# EAGLE board plantHAT (EAGLE 8.1.1)
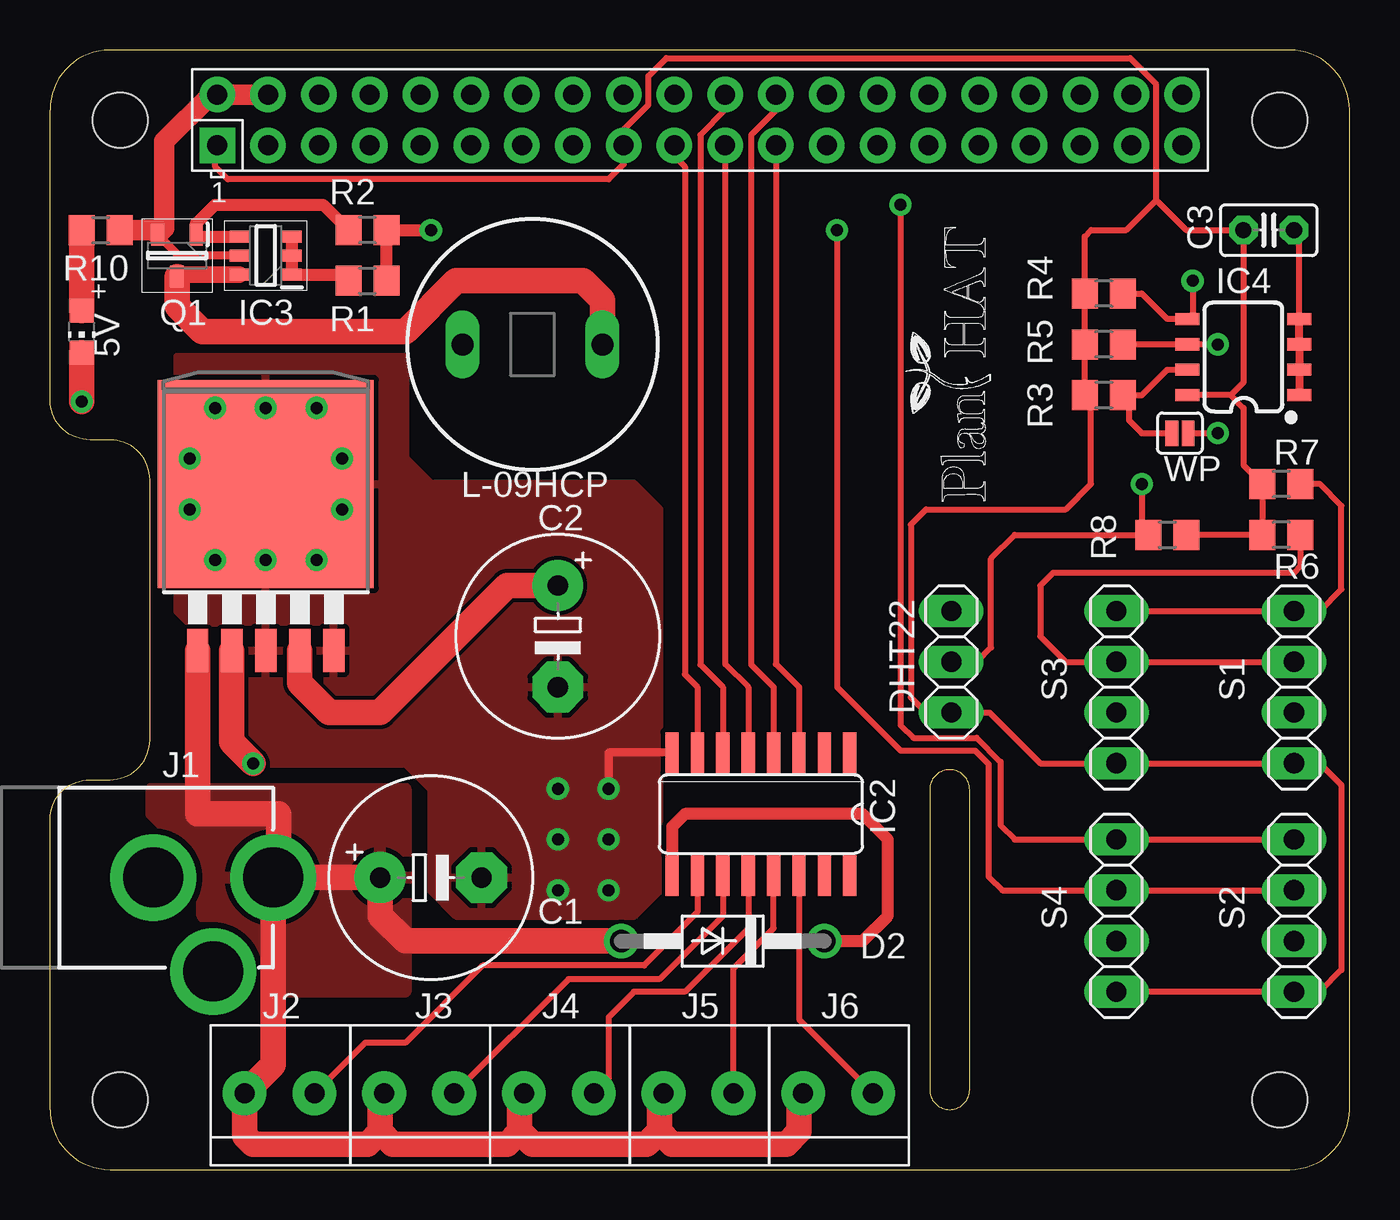
[diagram p0: board, top side]
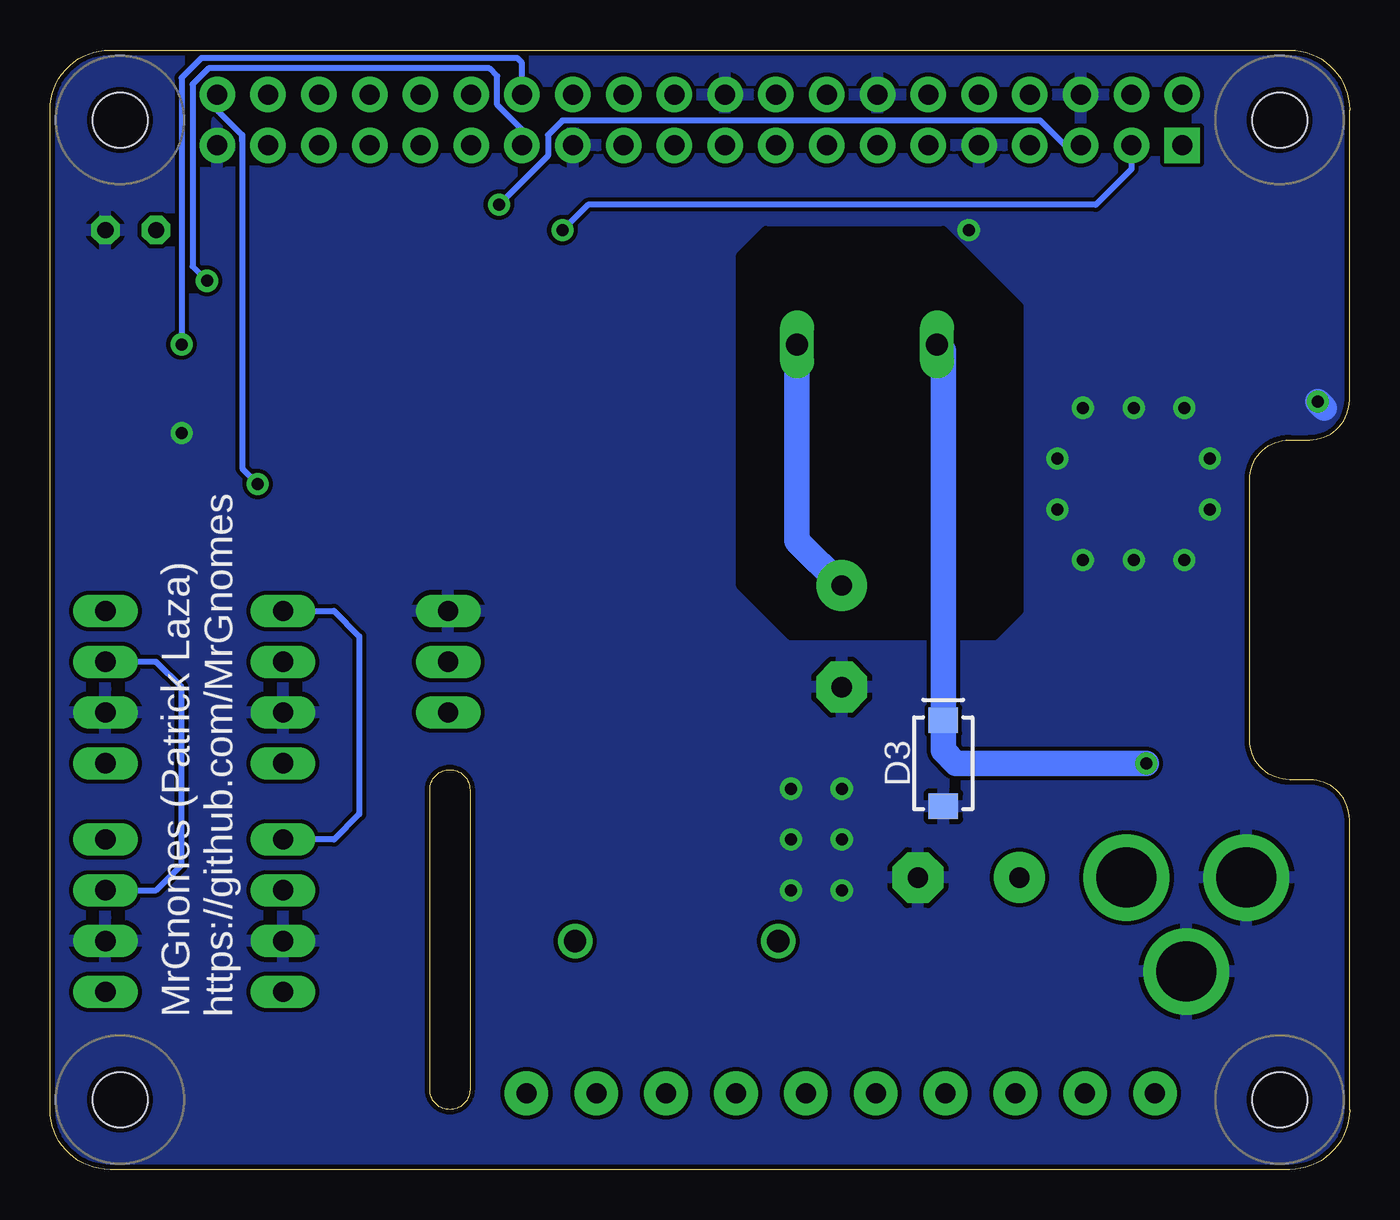
[diagram p1: board, bottom side, seen from below]

Size 65 x 56 mm. Coordinates in mm from the lower left corner, seen from the top.
Copper layers (1*16): Top 0.035mm / dielectric 1.5mm / Bottom 0.035mm
Design rules "SparkFun": minimum track width 8mil, minimum drill 20mil, track to track 8mil, track to pad 8mil, pad to pad 8mil, via to via 8mil, smd to smd 8mil, copper to edge 10mil, drill to drill 8mil, minimum pad ring 12mil, minimum via ring 10mil, stop-mask expansion 4mil, vias tented up to drill 25mil, thermal gap 10mil

## Footprints (pad centres in the part's own frame; a part is rotated, then mirrored left to right if it is on the bottom)
E5-10,5 = drill 1.016 pad 2.54: + -2.54,0 | drill 1.016 pad 2.54 octagon: - 2.54,0
C025-025X050 = drill 0.813 octagon: 1 -1.27,0; 2 1.27,0
DO41-10 = drill 1.118: A 5.08,0; C -5.08,0
SMA-DIODE = smd 1.27 x 1.47: A -2.15,0; C 2.15,0
1X03 = drill 1.016 long: 1 -2.54,0; 2 0,0; 3 2.54,0
TO263-5 = smd 1.067 x 2.159: 1 -3.404,-5.791; 2 -1.702,-5.791; 3 0,-5.791; 4 1.702,-5.791; 5 3.404,-5.791 | smd 10.8 x 10.41: 6 0,2.54
SO16 = smd 0.66 x 2.032: 1 -4.445,-3.073; 2 -3.175,-3.073; 3 -1.905,-3.073; 4 -0.635,-3.073; 5 0.635,-3.073; 6 1.905,-3.073; 7 3.175,-3.073; 8 4.445,-3.073; 9 4.445,3.073; 10 3.175,3.073; 11 1.905,3.073; 12 0.635,3.073; 13 -0.635,3.073; 14 -1.905,3.073; 15 -3.175,3.073; 16 -4.445,3.073
SOT95P275X110-6N = smd 1 x 0.6: 1 -1.3,0.95; 2 -1.3,0; 3 -1.3,-0.95; 4 1.3,-0.95; 5 1.3,0; 6 1.3,0.95
SO08 = smd 0.6 x 1.2: 1 -1.905,-2.8; 2 -0.635,-2.8; 3 0.635,-2.8; 4 1.905,-2.8; 5 1.905,2.8; 6 0.635,2.8; 7 -0.635,2.8; 8 -1.905,2.8
POWER_JACK_PTH = drill 2.997 pad 4.318: GND 0,7.7; GNDBREAK 4.7,10.7; PWR 0,13.7
1X2-3.5MM = drill 1 pad 2.184: 1 1.8,0; 2 -1.7,0
SMT-JUMPER_2_NO_SILK = smd 0.635 x 1.27: 1 -0.406,0; 2 0.406,0
CHIP-LED0805 = smd 1.2 x 1.2: A 0,-1.05; C 0,1.05
SD12-680 = drill 1.1 long: 1 -3.5,0; 2 3.5,0
SOT96P240X100-3N = smd 1.1 x 0.65: 1 -1.05,0.96; 2 -1.05,-0.96; 3 1.05,0
R0805 = smd 1.3 x 1.5: 1 -0.95,0; 2 0.95,0
1X04 = drill 1.016 long: 1 -3.81,0; 2 -1.27,0; 3 1.27,0; 4 3.81,0
RASPI_BOARD_B+HAT_DF_CF = drill 1 pad 1.778 square: 1 8.37,51.23 | drill 1 pad 1.778: 2 8.37,53.77; 3 10.91,51.23; 4 10.91,53.77; 5 13.45,51.23; 6 13.45,53.77; 7 15.99,51.23; 8 15.99,53.77; 9 18.53,51.23; 10 18.53,53.77; 11 21.07,51.23; 12 21.07,53.77; 13 23.61,51.23; 14 23.61,53.77; 15 26.15,51.23; 16 26.15,53.77; 17 28.69,51.23; 18 28.69,53.77; 19 31.23,51.23; 20 31.23,53.77; 21 33.77,51.23; 22 33.77,53.77; 23 36.31,51.23; 24 36.31,53.77; 25 38.85,51.23; 26 38.85,53.77; 27 41.39,51.23; 28 41.39,53.77; 29 43.93,51.23; 30 43.93,53.77; 31 46.47,51.23; 32 46.47,53.77; 33 49.01,51.23; 34 49.01,53.77; 35 51.55,51.23; 36 51.55,53.77; 37 54.09,51.23; 38 54.09,53.77; 39 56.63,51.23; 40 56.63,53.77 | hole 2.75: 3.5,3.5; 3.5,52.5; 61.5,3.5; 61.5,52.5

## Placement (x,y rotation side)
C1  330u/35V  [E5-10,5]  19.05,14.61 0 top
C2  180u  [E5-10,5]  25.4,26.67 270 top
C3  100n  [C025-025X050]  60.96,46.99 0 top
D2  1N4007  [DO41-10]  33.66,11.43 180 top
D3  B340A  [SMA-DIODE]  20.32,20.32 90 bottom
DHT22  [1X03]  45.09,25.4 90 top
IC1  [TO263-5]  10.79,31.75 0 top
IC2  ULN2003AD  [SO16]  35.56,17.78 180 top
IC3  DMMT5401-7-F  [SOT95P275X110-6N]  10.79,45.72 180 top
IC4  24LC256  [SO08]  59.69,40.64 90 top
J1  12V  [POWER_JACK_PTH]  -2.54,14.61 270 top
J2  1X2-3.5MM  [1X2-3.5MM]  11.43,3.81 0 top
J3  1X2-3.5MM  [1X2-3.5MM]  18.41,3.81 0 top
J4  1X2-3.5MM  [1X2-3.5MM]  25.4,3.81 0 top
J5  1X2-3.5MM  [1X2-3.5MM]  32.38,3.81 0 top
J6  1X2-3.5MM  [1X2-3.5MM]  39.37,3.81 0 top
JP1  WP  [SMT-JUMPER_2_NO_SILK]  56.52,36.83 180 top
L2  5V  [CHIP-LED0805]  1.59,41.91 180 top
L-09HCP  68u  [SD12-680]  24.13,41.27 0 top
Q1  DMG2305UX-7  [SOT96P240X100-3N]  6.35,45.72 270 top
R1  10k  [R0805]  15.88,44.45 0 top
R2  47k  [R0805]  15.88,46.99 180 top
R3  3,9k  [R0805]  52.7,38.73 180 top
R4  3,9k  [R0805]  52.7,43.81 180 top
R5  3,8k  [R0805]  52.7,41.27 180 top
R6  10k  [R0805]  61.59,31.75 180 top
R7  10k  [R0805]  61.59,34.29 180 top
R8  10k  [R0805]  55.88,31.75 0 top
R10  330  [R0805]  2.54,46.99 0 top
S1  [1X04]  62.23,24.13 90 top
S2  [1X04]  62.23,12.7 90 top
S3  [1X04]  53.34,24.13 90 top
S4  [1X04]  53.34,12.7 90 top
X2  RASPI_BOARD_B+#_HDC  [RASPI_BOARD_B+HAT_DF_CF]  0,0 0 top

## Library data of the parts
C1-C3 R1-R8 R10 = resistor
D2 = diode
D3 = SparkFun-DiscreteSemi; PROD_ID: DIO-09886
DHT22 S1-S4 = pinhead
IC1 = linear
IC2 = uln-udn
IC3 = plantHead; DESCRIPTION: Transistor Dual PNP 150V 0.2A SOT26-6 Diodes Inc DMMT5401-7-F Dual PNP Bipolar Transistor, -200 mA, -150 V, 6-Pin SOT-26; HEIGHT: 1.1mm; MANUFACTURER_NAME: Diodes Inc.; MANUFACTURER_PART_NUMBER: DMMT5401-7-F; RS_PART_NUMBER: 1220640; SUPPLIER_NAME: RS
IC4 = SparkFun-IC-Memory; PROD_ID: IC-09714
J1 = SparkFun-Connectors; PROD_ID: CONN-08197
J2-J6 L2 = adafruit
JP1 = SparkFun-Jumpers
L-09HCP = plantHead
Q1 = plantHead; DESCRIPTION: MOSFET P-Ch 20V 5A Enhancement SOT23 Diodes Inc DMG2305UX-7 P-channel MOSFET Transistor, -3.3 A, -20 V, 3-Pin SOT-23; HEIGHT: 1mm; MANUFACTURER_NAME: Diodes Inc.; MANUFACTURER_PART_NUMBER: DMG2305UX-7; RS_PART_NUMBER: 8270452; SUPPLIER_NAME: RS
X2 = Bastelstube_raspberry

## Nets
3.3V: C3.1 DHT22.1 IC4.8 R3.2 R4.2 R5.2 R6.2 R7.2 R8.2 S1.1 S2.1 S3.1 S4.1 X2.1 X2.17
5V: IC3.5 Q1.2 R10.2 X2.2 X2.4
5V_PRE: C2.+ IC1.4 IC3.6 L-09HCP.2 Q1.3
12V: C1.+ D2.A IC1.1 J1.PWR J2.2 J3.2 J4.2 J5.2 J6.2
GND: C1.- C2.- C3.2 D3.A DHT22.3 IC1.3 IC1.5 IC1.6 IC2.8 IC4.1 IC4.2 IC4.3 IC4.4 J1.GND J1.GNDBREAK JP1.1 L2.C R1.2 R2.1 S1.2 S2.2 S3.2 S4.2 X2.6 X2.9 X2.14 X2.20 X2.25 X2.39
GND_F: X2.30
GND_G: X2.34
ID_SC: IC4.6 R5.1 X2.28
ID_SD: IC4.5 R4.1 X2.27
N$1: D3.C IC1.2 L-09HCP.1
N$2: X2.29
N$4: IC2.14 J6.1
N$5: IC2.13 J5.1
N$6: IC2.12 J4.1
N$7: IC2.11 J3.1
N$8: IC2.10 J2.1
N$9: IC3.1 IC3.2 IC3.3 R1.1
N$10: IC3.4 Q1.1 R2.2
N$11: IC4.7 JP1.2 R3.1
N$13: X2.31
N$14: X2.32
N$15: X2.33
N$16: X2.35
N$17: X2.36
N$18: X2.37
N$19: X2.38
N$20: L2.A R10.1
N$21: D2.C IC2.9
SCL: R7.1 S1.4 S2.4 S3.4 S4.4 X2.5
SDA: R6.1 S1.3 S2.3 S3.3 S4.3 X2.3
SENS_1: DHT22.2 R8.1 X2.40
ULN_3: IC2.3 X2.23
ULN_4: IC2.4 X2.24
ULN_5: IC2.5 X2.21
ULN_6: IC2.6 X2.22
ULN_7: IC2.7 X2.19

## Tracks (layer width: path | path; a pad name or v marks a point on that pad's centre or on a via)
3.3V
  Top 0.305: X2.1 8.26,51.12 8.26,50.16 8.89,49.53 27.94,49.53 28.69,50.28 X2.17 28.69,52.01 29.93,53.25 29.93,54.7 30.83,55.59 54.03,55.59 55.34,54.29 55.34,48.49 | 59.05,38.73 59.69,39.37 C3.1 56.83,46.99 55.34,48.49 | 59.05,38.73 IC4.8 | 59.05,38.73 59.69,38.1 59.69,35.24 R7.2 R6.2 R8.2 | S4.1 S2.1 63.5,8.89 64.59,9.98 64.59,19.23 63.5,20.32 S1.1 S3.1 49.53,20.32 46.99,22.86 DHT22.1 43.81,22.86 43.05,23.62 43.05,32.26 43.81,33.02 50.8,33.02 52.07,34.29 52.07,38.42 R3.2 R5.2 R4.2 51.76,46.67 52.07,46.99 53.84,46.99 55.34,48.49
5V
  Top 0.406: IC3.5 6.44,45.72 Q1.2
  Top 1.016: X2.4 X2.2 8.05,53.77 5.71,51.44 5.71,47.09 Q1.2 5.17,46.99 R10.2
5V_PRE
  Top 0.813: IC3.6 6.45,44.77 Q1.3
  Top 1.27: L-09HCP.2 27.63,43.49 26.67,44.45 20.32,44.45 17.78,41.91 7.62,41.91 6.35,43.18 Q1.3 | IC1.4 12.5,24.33 13.97,22.86 16.51,22.86 22.86,29.21 C2.+
  Bottom 1.27: L-09HCP.2 27.63,31.44 C2.+
12V
  Top 1.27: J1.PWR 11.16,5.24 J2.2 9.73,1.7 10.16,1.27 15.88,1.27 16.51,1.91 | 16.51,1.91 16.51,3.6 J3.2 | 16.51,1.91 17.14,1.27 22.86,1.27 23.5,1.91 | 23.5,1.91 23.5,3.6 J4.2 | 23.5,1.91 24.13,1.27 29.84,1.27 30.48,1.91 | 30.48,1.91 30.48,3.6 J5.2 | 30.48,1.91 31.11,1.27 36.83,1.27 37.47,1.91 37.47,3.6 J6.2 | J1.PWR C1.+ 16.51,12.7 17.78,11.43 D2.A | J1.PWR 11.43,14.61 11.43,17.78 7.39,17.78 IC1.1
  pour Top (isolate 0.305): 5.08,19.05 17.78,19.05 17.78,8.89 11.43,8.89 7.62,12.7 7.62,15.24 5.08,17.78
GND  (via drill 0.6)
  Top 0.305: JP1.1 v58.42,36.83 | IC4.4 62.49,46.73 C3.2
  Top 0.406: IC4.4 IC4.3 IC4.2 IC4.1 | IC2.8 27.94,20.85 v27.94,19.05
  Top 0.61: R1.2 R2.1 v19.05,46.99
  Top 1.27: L2.C v1.59,38.42
  Bottom 1.27: v1.59,38.42 1.27,38.1
  other vias: 8.26,38.1 10.79,38.1 13.34,38.1 25.4,13.97 25.4,16.51 27.94,16.51 27.94,13.97 6.99,35.56 6.99,33.02 8.26,30.48 10.79,30.48 13.34,30.48 14.61,33.02 14.61,35.56 25.4,19.05
  pour Bottom: 0,55.88 0,0 64.77,0 64.77,55.88
  pour Top: 6.35,40.64 6.35,27.94 7.62,26.67 7.62,21.59 8.89,20.32 17.78,20.32 19.05,19.05 19.05,13.97 20.32,12.7 29.21,12.7 30.48,13.97 30.48,33.02 29.21,34.29 19.05,34.29 17.78,35.56 17.78,40.64
ID_SC  (via drill 0.6 pad 0.25)
  Top 0.305: R5.1 IC4.6 v58.42,41.27
  Bottom 0.305: X2.28 41.39,55.36 41.62,55.59 57.44,55.59 58.42,54.61 v58.42,41.27
ID_SD  (via drill 0.6 pad 0.25)
  Top 0.305: 53.34,44.13 R4.1 54.61,43.81 55.88,42.55 IC4.5 57.15,42.8 v57.15,44.45
  Bottom 0.305: X2.27 41.39,52.01 42.63,53.25 42.63,54.7 43.02,55.09 57.08,55.09 57.88,54.29 57.88,45.17 v57.15,44.45
N$1  (via drill 0.6)
  Top 1.27: IC1.2 9.09,21.39 v10.16,20.32
  Bottom 1.27: v10.16,20.32 19.68,20.32 20.32,20.95 D3.C 20.32,40.97 L-09HCP.1
N$3
  cutout Bottom: 30.48,45.72 29.21,46.99 20.32,46.99 16.51,43.18 16.51,27.94 17.78,26.67 27.94,26.67 30.48,29.21
N$4
  Top 0.305: IC2.14 37.47,7.51 J6.1
N$5
  Top 0.305: J5.1 34.19,10.05 36.2,12.06 IC2.13
N$6
  Top 0.305: IC2.12 34.92,12.06 31.75,8.89 29.21,8.89 27.94,7.62 27.94,4.55 J4.1
N$7
  Top 0.305: IC2.11 33.66,12.7 30.48,9.53 25.93,9.53 J3.1
N$8
  Top 0.305: 32.38,13.97 IC2.10 32.38,13.97 | 32.38,13.97 32.38,12.88 29.71,10.21 21.64,10.21 17.78,6.35 15.77,6.35 J2.1
N$9
  Top 0.61: IC3.3 IC3.2 IC3.1 14.61,44.77 R1.1
N$10
  Top 0.61: IC3.4 7.41,46.67 Q1.1 7.31,47.31 8.26,48.26 13.65,48.26 R2.2 15.24,47.3
N$11
  Top 0.305: IC4.7 55.88,40.01 54.61,38.73 R3.1 53.98,38.41 53.98,37.47 54.61,36.83 JP1.2
N$20
  Top 1.27: R10.1 L2.A
N$21
  Top 0.61: IC2.9 31.11,17.14 31.75,17.78 40.64,17.78 41.91,16.51 41.91,12.7 40.64,11.43 D2.C
SCL  (via drill 0.6 pad 0.25)
  Top 0.305: R7.1 63.5,34.29 64.59,33.2 64.59,29.03 63.5,27.94 S1.4 S3.4 | S2.4 S4.4 48.26,16.51 47.55,17.22 47.55,20.4 46.35,21.59 43.18,21.59 42.55,22.23 v42.55,48.26
  Bottom 0.305: X2.5 14.23,51.23 15.47,52.48 39.37,52.48 40.09,51.75 40.09,50.71 v42.55,48.26 | S3.4 50.8,27.94 49.53,26.67 49.53,17.78 50.8,16.51 S4.4
SDA  (via drill 0.6 pad 0.25)
  Top 0.305: S2.3 S4.3 47.62,13.97 46.95,14.65 46.95,20.28 46.27,20.95 42.55,20.95 39.37,24.13 v39.37,46.99 | R6.1 62.55,30.16 62.23,29.84 50.16,29.84 49.53,29.21 49.53,26.67 50.8,25.4 S3.3 S1.3
  Bottom 0.305: X2.3 10.91,50.05 12.7,48.26 38.1,48.26 v39.37,46.99 | S2.3 59.69,13.97 58.42,15.24 58.42,24.13 59.69,25.4 S1.3
SENS_1  (via drill 0.6 pad 0.25)
  Top 0.305: R8.1 55.24,31.43 | R8.1 48.26,31.75 47.07,30.56 47.07,26.11 46.35,25.4 DHT22.2 | v54.61,34.29 54.61,32.07 R8.1
  Bottom 0.305: 55.38,51.44 55.38,51.75 | X2.40 56.63,52.99 55.38,51.75 | 55.38,51.75 55.38,35.06 v54.61,34.29
ULN_3
  Top 0.305: X2.23 36.31,25.29 37.47,24.13 IC2.3
ULN_4
  Top 0.305: X2.24 36.31,52.99 35.06,51.75 35.06,25.26 36.2,24.13 IC2.4
ULN_5
  Top 0.305: X2.21 33.77,25.29 34.92,24.13 IC2.5
ULN_6
  Top 0.305: X2.22 33.77,52.99 32.52,51.75 32.52,25.26 33.66,24.13 IC2.6
ULN_7
  Top 0.305: X2.19 31.23,50.69 31.75,50.16 31.75,24.77 32.38,24.13 IC2.7

## Text on the board
bPlace: MrGnomes (Patrick Laza) / https://github.com/MrGnomes